# Altium PCB PAY_IFP_V1.PcbDoc (part 1 of 5)
Units mil, origin at the board's own origin, x right, y up, seen from the top; angles counter-clockwise.
Board outline 3661.42 x 3543.31 mil, 6 copper layers (L1 TOP, L2 GND 1, L3 SIGNAL, L4 PWR, L5 GND 2, L6 BOT), stack 59.685 mil thick; 511 components, 371 nets, 2264 pads, 383 vias.
Unrouted connection lines stored in the file: 1001.
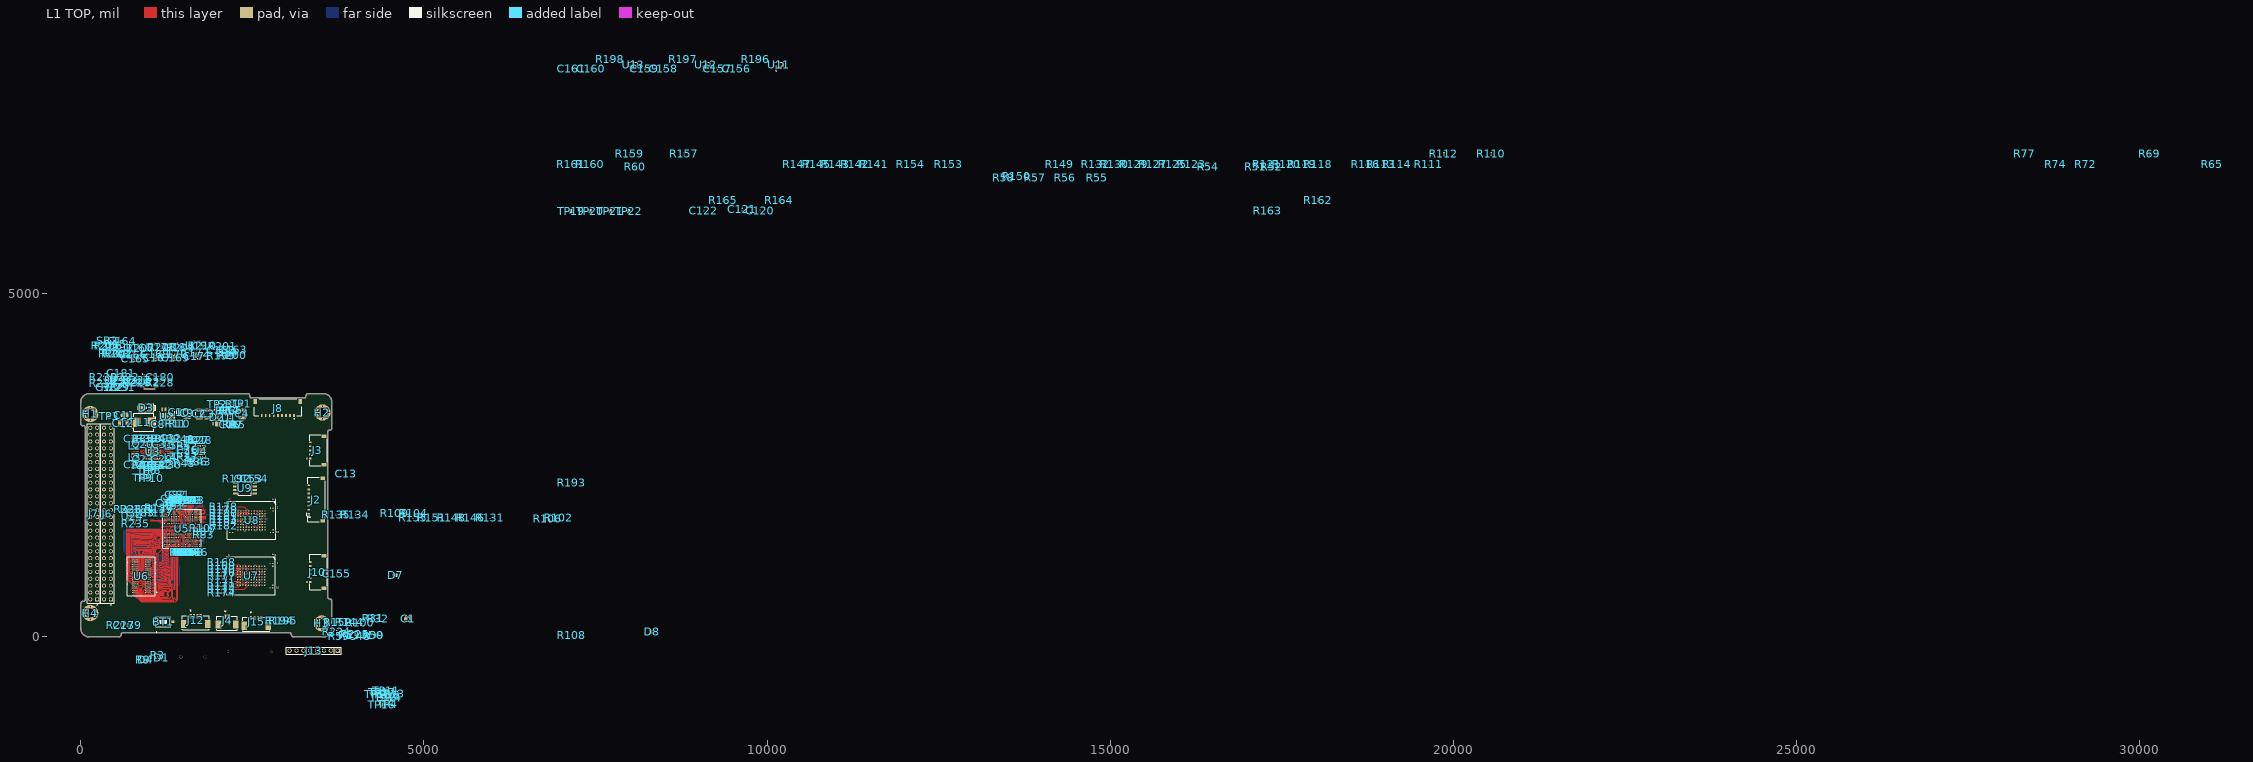
[diagram p0: L1 TOP view]
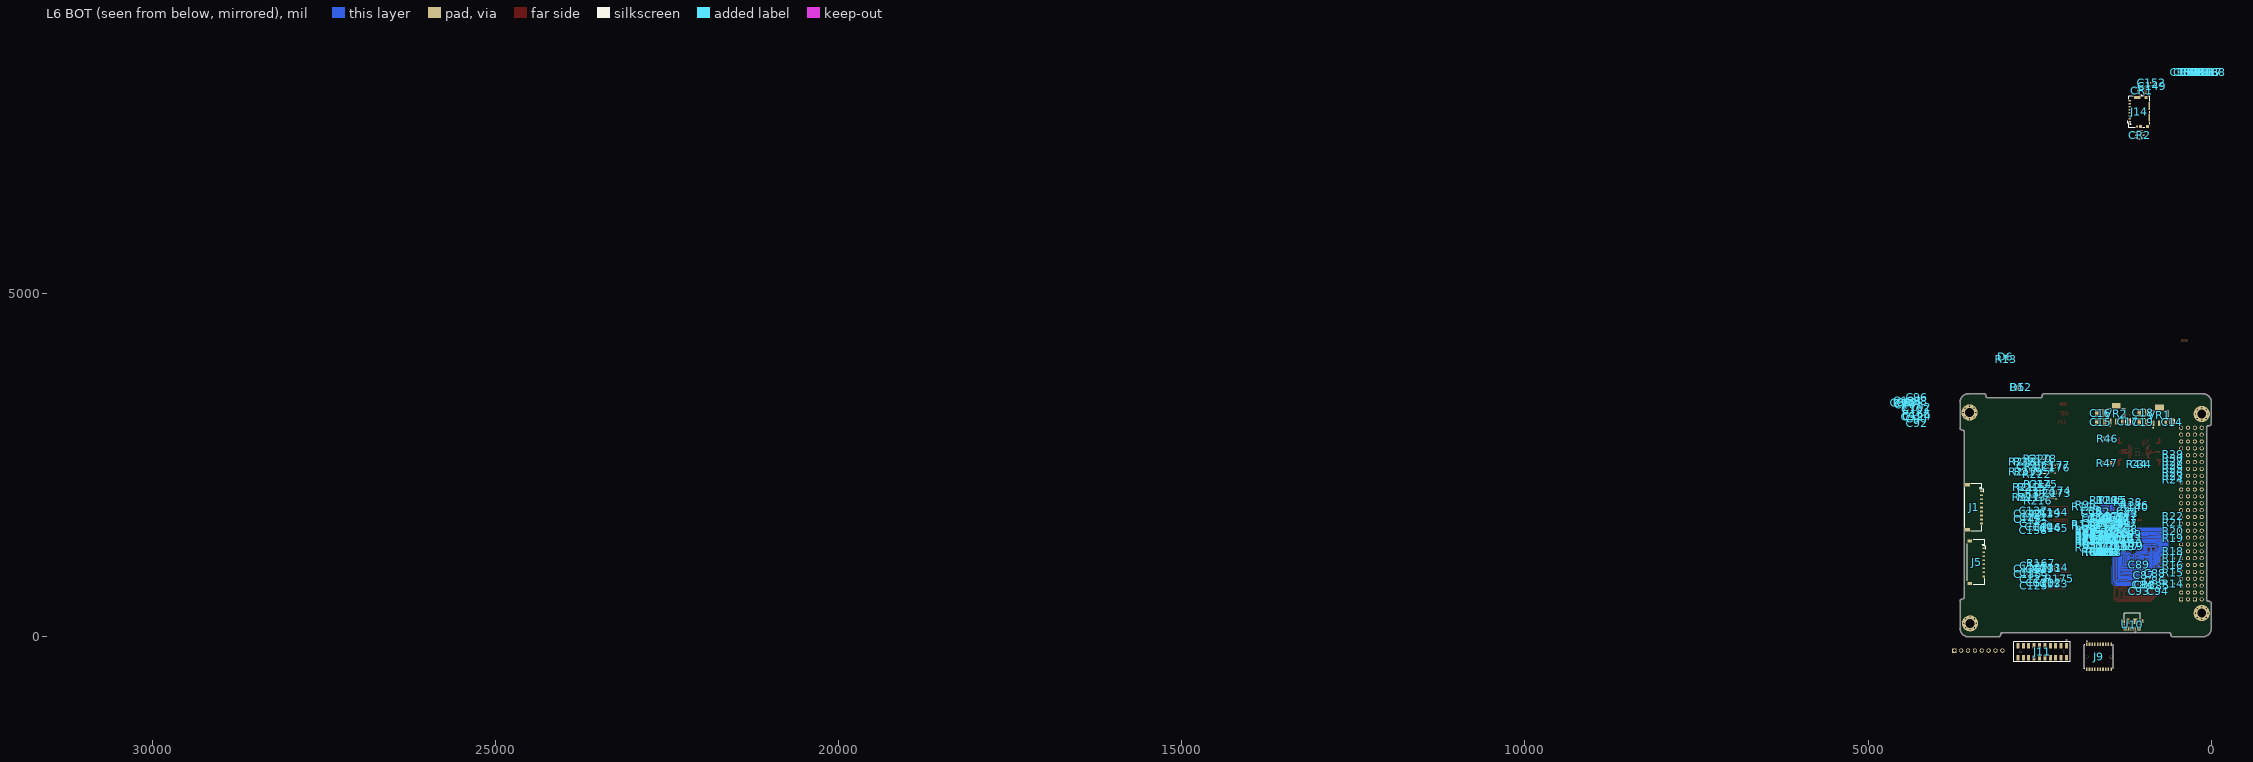
[diagram p1: L6 BOT view, seen from below]

## Layer stack, top to bottom
Top Solder: solder mask 0.4724, Solder Resist, Dk 4.3
L1 TOP: signal copper 0.7087
Dielectric 4: prepreg 3.5433, PP-006, Dk 4.5
L2 GND 1: signal copper 1.378
Dielectric 2: core 4.3307, PP-006, Dk 4.1
L3 SIGNAL: signal copper 1.378
Dielectric 1: dielectric 37.0079, FR-4, Dk 4.2
L4 PWR: signal copper 1.378
Dielectric 3: core 4.3307, PP-006, Dk 4.1
L5 GND 2: signal copper 1.378
Dielectric 5: prepreg 3.5433, PP-006, Dk 4.5
L6 BOT: signal copper 0.7087
Bottom Solder: solder mask 0.4724, Solder Resist, Dk 4.3

## Board outline
0,125.98 ccw(c125.98,125.98) 125.98,0 559.06,0 ccw(c559.06,31.5) 590.55,31.5 cw(c622.05,31.5) 622.05,62.99 2007.87,62.99 2657,62.99 2657.48,62.99 3039.37,62.99 cw(c3039.37,31.5) 3070.87,31.5 ccw(c3102.36,31.5) 3102.36,0 3535.43,0 ccw(c3535.43,125.98) 3661.42,125.98 3661.42,519.69 ccw(c3629.92,519.69) 3629.92,551.18 cw(c3629.92,582.68) 3598.43,582.68 3598.43,2980.59 cw(c3629.92,2980.59) 3629.92,3012.09 ccw(c3629.92,3043.59) 3661.42,3043.59 3661.42,3417.6 ccw(c3535.43,3417.32) 3535.71,3543.31 3535.43,3543.31 3314.96,3543.31 ccw(c3314.96,3511.81) 3283.46,3511.81 cw(c3251.97,3511.81) 3251.97,3480.31 2496.06,3480.32 cw(c2496.06,3511.81) 2464.57,3511.81 ccw(c2433.07,3511.81) 2433.07,3543.31 125.98,3543.31 125.71,3543.31 ccw(c125.98,3417.32) 0,3417.32 0,3108.27 ccw(c31.5,3108.27) 31.5,3076.77 39.37,3076.75 39.37,3076.77 cw(c39.37,3045.28) 70.87,3045.28 70.86,548.41 cw(c39.37,548.41) 39.37,516.92 31.49,516.94 ccw(c31.49,485.44) 0,485.44

## Design rules (kind name [scope] priority, off if disabled: settings)
BoardOutlineClearance [All] p1: gap=7.87 ignorepadtopadclearanceinfootprint=FALSE
Clearance Clearance_HD [InNetClass('HD')] p1: gap=23.62 ignorepadtopadclearanceinfootprint=FALSE
Clearance Clearance_KEEPOUT [IsKeepOut] p2: gap=0 ignorepadtopadclearanceinfootprint=FALSE
Clearance Clearance_BGA [WithinRoom('ROOM_SAMA7')] p3: gap=3.94 ignorepadtopadclearanceinfootprint=FALSE except(7.87: SMDPad-Fill SMDPad-Poly SMDPad-Region THPad-Fill THPad-Poly THPad-Region)
Clearance [All] p4: gap=3.94 ignorepadtopadclearanceinfootprint=FALSE except(4.92: Arc-Arc Arc-Track Track-Track Track-Via; 5.91: Arc-Fill Arc-Poly Arc-Region Track-Fill Track-Poly Track-Region SMDPad-Fill Via-Fill Via-Poly Via-Region Fill-Fill Fill-Poly Fill-Region Poly-Poly Poly-Region Region-Region; 7.87: SMDPad-Poly SMDPad-Region THPad-Fill THPad-Poly THPad-Region)
ComponentClearance [All] p1: gap=3.94 collisioncheckmode=3 verticalgap=0 showdistances=FALSE
DiffPairsRouting DiffPairs_100 [InDifferentialPairClass('DIFF100')] p1: maxlimit=9.45 minlimit=5.91 mostfreqgap=9.06 toplayer_mingap=6.3 toplayer_maxgap=6.3 toplayer_prefgap=6.3 toplayer_minwidth=4.92 toplayer_maxwidth=4.92 toplayer_prefwidth=4.92 midlayer2_mingap=9.06 midlayer2_maxgap=9.06 midlayer2_minwidth=3.94 midlayer2_maxwidth=3.94 midlayer2_prefwidth=3.94 midlayer3_mingap=9.06 midlayer3_maxgap=9.06 midlayer3_minwidth=3.94 midlayer3_maxwidth=3.94 midlayer3_prefwidth=3.94 bottomlayer_mingap=6.3 bottomlayer_maxgap=6.3 bottomlayer_prefgap=6.3 bottomlayer_minwidth=4.92 bottomlayer_maxwidth=4.92 bottomlayer_prefwidth=4.92 impedanceprofiledriven=TRUE impedanceprofileid={7DCAE575-E62E-4FB4-830B-AD6A277E48F7} impedanceprofilevalue=100.000000 filterlayerstackid={D54526CB-8AD5-485F-8D58-B8B2ED083D53} maxuncoupledlength=500
DiffPairsRouting DiffPairs_90 [InDifferentialPairClass('DIFF90')] p2: maxlimit=7.87 minlimit=5.91 mostfreqgap=7.87 toplayer_maxgap=5.91 toplayer_prefgap=5.91 toplayer_minwidth=4.92 toplayer_maxwidth=4.92 toplayer_prefwidth=4.92 midlayer2_mingap=7.87 midlayer2_minwidth=4.92 midlayer2_maxwidth=4.92 midlayer2_prefwidth=4.92 midlayer3_mingap=7.87 midlayer3_minwidth=4.92 midlayer3_maxwidth=4.92 midlayer3_prefwidth=4.92 bottomlayer_maxgap=5.91 bottomlayer_prefgap=5.91 bottomlayer_minwidth=4.92 bottomlayer_maxwidth=4.92 bottomlayer_prefwidth=4.92 impedanceprofiledriven=TRUE impedanceprofileid={482B14A7-7A58-4C4E-B4EF-1ACECD4C47D5} impedanceprofilevalue=90.000000 filterlayerstackid={D54526CB-8AD5-485F-8D58-B8B2ED083D53} maxuncoupledlength=1968.5
FanoutControl Fanout_Small [(CompPinCount < 5)] p4: bgadir=Out bgaviamode=Closest fanoutstyle=Auto fanoutdirection=OutOnly viagrid=1 // Fanout_Small (Default Rule)
FanoutControl Fanout_Default [All] p5: bgadir=Out bgaviamode=Centered fanoutstyle=Auto fanoutdirection=OutOnly viagrid=1 // Fanout_Default (Default Rule)
HoleSize [All] p1: absolutevalues=TRUE maxlimit=196.85 minlimit=1 maxpercent=80.000 minpercent=20.000
MatchedLengths "Schematic Matched Net Lengths_5" [InNetClass('DIFF90')] p1: tolerance=4 checknetsindiffpair=TRUE checkdiffpairvsdiffpair=FALSE checkxsignals=FALSE checkothers=FALSE
MatchedLengths "Schematic Matched Net Lengths_1" [InNetClass('JTAG')] p2: tolerance=78.74 checknetsindiffpair=FALSE checkdiffpairvsdiffpair=TRUE checkxsignals=TRUE checkothers=TRUE
MatchedLengths "Schematic Matched Net Lengths_9" [InNetClass('DDR-ADDR-CTL')] p3: tolerance=10 checknetsindiffpair=FALSE checkdiffpairvsdiffpair=TRUE checkxsignals=TRUE checkothers=TRUE
MatchedLengths "Schematic Matched Net Lengths_8" [InNetClass('DDR-LANE1')] p4: tolerance=10 checknetsindiffpair=FALSE checkdiffpairvsdiffpair=TRUE checkxsignals=TRUE checkothers=TRUE
MatchedLengths "Schematic Matched Net Lengths_3" [InNetClass('DDR-LANE0')] p5: tolerance=10 checknetsindiffpair=FALSE checkdiffpairvsdiffpair=TRUE checkxsignals=TRUE checkothers=TRUE
MatchedLengths "Schematic Matched Net Lengths_2" [InNetClass('DIFF100')] p6: tolerance=4 checknetsindiffpair=TRUE checkdiffpairvsdiffpair=FALSE checkxsignals=FALSE checkothers=FALSE
MatchedLengths CSI [InxSignalClass('xSignals_CSI')] p7: tolerance=1000 checknetsindiffpair=FALSE checkdiffpairvsdiffpair=TRUE checkxsignals=TRUE checkothers=TRUE usedelayunits=TRUE delaytolerance=5.000000
MatchedLengths DIFF_PAIR [InDifferentialPairClass('All Differential Pairs')] p8: tolerance=1000 checknetsindiffpair=TRUE checkdiffpairvsdiffpair=FALSE checkxsignals=FALSE checkothers=FALSE usedelayunits=TRUE delaytolerance=6.000000
MinimumSolderMaskSliver [All] p1: minsoldermaskwidth=4.72
PlaneConnect PlaneConnect_1 [InNet('GND') and IsVia] p1: planeconnectstyle=Direct reliefexpansion=20 reliefentries=4 reliefconductorwidth=10 reliefairgap=10
PlaneConnect [not(InNet('GND') and IsVIA)] p2: planeconnectstyle=Relief reliefexpansion=20 reliefentries=4 reliefconductorwidth=10 reliefairgap=10
PolygonConnect PolygonConnect_14 [All vs IsNamedPolygon('VDDIODDR_L01_P018')] p1: connectstyle=Direct reliefconductorwidth=10 reliefentries=4 polygonreliefangle="90 Angle" airgapwidth=10
PolygonConnect PolygonConnect_13 [All vs IsNamedPolygon('VDDIODDR_L01_P018')] p2: connectstyle=Direct reliefconductorwidth=10 reliefentries=4 polygonreliefangle="90 Angle" airgapwidth=10
PolygonConnect PolygonConnect_12 [All vs IsNamedPolygon('3V3_L01_P017')] p3: connectstyle=Direct reliefconductorwidth=10 reliefentries=4 polygonreliefangle="90 Angle" airgapwidth=10
PolygonConnect PolygonConnect_11 [All vs IsNamedPolygon('VDDCPU_L01_P016')] p4: connectstyle=Direct reliefconductorwidth=10 reliefentries=4 polygonreliefangle="90 Angle" airgapwidth=10
PolygonConnect PolygonConnect_10 [All vs IsNamedPolygon('VDDCORE_L01_P015')] p5: connectstyle=Direct reliefconductorwidth=10 reliefentries=4 polygonreliefangle="90 Angle" airgapwidth=10
PolygonConnect PolygonConnect_9 [All vs IsNamedPolygon('DCDC1_L01_P014')] p6: connectstyle=Direct reliefconductorwidth=10 reliefentries=4 polygonreliefangle="90 Angle" airgapwidth=10
PolygonConnect PolygonConnect_8 [All vs IsNamedPolygon('DCDC4_L01_P013')] p7: connectstyle=Direct reliefconductorwidth=10 reliefentries=4 polygonreliefangle="90 Angle" airgapwidth=10
PolygonConnect PolygonConnect_7 [All vs IsNamedPolygon('DCDC2_L01_P012')] p8: connectstyle=Direct reliefconductorwidth=10 reliefentries=4 polygonreliefangle="90 Angle" airgapwidth=10
PolygonConnect PolygonConnect_6 [All vs IsNamedPolygon('DCDC3_L01_P011')] p9: connectstyle=Direct reliefconductorwidth=10 reliefentries=4 polygonreliefangle="90 Angle" airgapwidth=10
PolygonConnect PolygonConnect_5 [All vs IsNamedPolygon('12V_CONN_L01_P008')] p10: connectstyle=Direct reliefconductorwidth=10 reliefentries=4 polygonreliefangle="90 Angle" airgapwidth=10
PolygonConnect PolygonConnect_4 [All vs IsNamedPolygon('12V_L01_P007')] p11: thpad.connectstyle=NoConnect thpad.reliefconductorwidth=10 thpad.reliefentries=4 thpad.polygonreliefangle="90 Angle" thpad.airgapwidth=10 smdpad.connectstyle=Direct smdpad.reliefconductorwidth=10 smdpad.reliefentries=4 smdpad.polygonreliefangle="90 Angle" smdpad.airgapwidth=10 via.connectstyle=Direct via.reliefconductorwidth=10 via.reliefentries=4 via.polygonreliefangle="90 Angle" via.airgapwidth=10
PolygonConnect PolygonConnect_3 [All vs IsNamedPolygon('5V_L01_P001')] p12: connectstyle=Direct reliefconductorwidth=10 reliefentries=4 polygonreliefangle="90 Angle" airgapwidth=10
PolygonConnect PolygonConnect_2 [All vs IsNamedPolygon('NETC8_1_L01_P000')] p13: connectstyle=Direct reliefconductorwidth=10 reliefentries=4 polygonreliefangle="90 Angle" airgapwidth=10
PolygonConnect PolygonConnect_1 [(InNet('+5V_USB-Adaptor') OR InNet('+3V3_CM4') OR InNet('+5V_AUX-Adaptor'))] p14: connectstyle=Direct reliefconductorwidth=10 reliefentries=4 polygonreliefangle="90 Angle" airgapwidth=10
PolygonConnect [NOT (InComponent('U4') OR InComponent('U7'))] p15: thpad.connectstyle=Relief thpad.reliefconductorwidth=15.75 thpad.reliefentries=4 thpad.polygonreliefangle="90 Angle" thpad.airgapwidth=10 thpad.conductorbypadedge=TRUE thpad.mindistance=15 thpad.enablemindistance=FALSE smdpad.connectstyle=Relief smdpad.reliefconductorwidth=7.87 smdpad.reliefentries=4 smdpad.polygonreliefangle="90 Angle" smdpad.airgapwidth=5.91 smdpad.conductorbypadedge=TRUE smdpad.mindistance=15 smdpad.enablemindistance=FALSE via.connectstyle=Direct via.reliefconductorwidth=7.87 via.reliefentries=4 via.polygonreliefangle="90 Angle" via.airgapwidth=10
RoutingVias [All] p1: holewidth=7.87 width=15.75 viastyle="Through Hole" minholewidth=7.87 minwidth=13.78 maxholewidth=39.37 maxwidth=78.74
SilkToSilkClearance [All] p1: silktosilkclearance=4.92
SilkToSolderMaskClearance [IsPad] p1: minsilkscreentomaskgap=3.94 clearancetoexposedcopper=TRUE
SolderMaskExpansion [All] p1: expansion=4 istentingtop=FALSE
SupplyNets "Schematic Supply Nets_17" [InNet('3V3_COM')] p1: voltage=0.000
SupplyNets "Schematic Supply Nets_25" [InNet('12V')] p2: voltage=0.000
SupplyNets "Schematic Supply Nets_24" [InNet('VLDO1')] p3: voltage=0.000
SupplyNets "Schematic Supply Nets_23" [InNet('DDR_VREF')] p4: voltage=0.000
SupplyNets "Schematic Supply Nets_22" [InNet('GOM_VBAT')] p5: voltage=0.000
SupplyNets "Schematic Supply Nets_21" [InNet('3.3_VBAT')] p6: voltage=0.000
SupplyNets "Schematic Supply Nets_20" [InNet('BUS_5V')] p7: voltage=0.000
SupplyNets "Schematic Supply Nets_18" [InNet('BUS_3V3')] p8: voltage=0.000
SupplyNets "Schematic Supply Nets_16" [InNet('GND')] p9: voltage=0.000
SupplyNets "Schematic Supply Nets_14" [InNet('DCDC1')] p10: voltage=0.000
SupplyNets "Schematic Supply Nets_13" [InNet('DCDC3')] p11: voltage=0.000
SupplyNets "Schematic Supply Nets_12" [InNet('DCDC4')] p12: voltage=0.000
SupplyNets "Schematic Supply Nets_11" [InNet('3V3')] p13: voltage=0.000
SupplyNets "Schematic Supply Nets_10" [InNet('VLDO2')] p14: voltage=0.000
SupplyNets "Schematic Supply Nets_9" [InNet('VDDCPU')] p15: voltage=0.000
SupplyNets "Schematic Supply Nets_8" [InNet('12V_CONN')] p16: voltage=0.000
SupplyNets "Schematic Supply Nets_7" [InNet('VDDOUT25')] p17: voltage=0.000
SupplyNets "Schematic Supply Nets_6" [InNet('VDDIODDR')] p18: voltage=0.000
SupplyNets "Schematic Supply Nets_5" [InNet('DCDC2')] p19: voltage=0.000
SupplyNets "Schematic Supply Nets_4" [InNet('STX_12V')] p20: voltage=0.000
SupplyNets "Schematic Supply Nets_3" [InNet('5V')] p21: voltage=0.000
SupplyNets "Schematic Supply Nets_2" [InNet('VDDCORE')] p22: voltage=0.000
SupplyNets "Schematic Supply Nets_1" [InNet('VDDBU')] p23: voltage=0.000
SupplyNets "Schematic Supply Nets" [InNet('3V3_eMMC')] p24: voltage=0.000
Width Width_1 [All] p1: maxlimit=78.74 minlimit=3.94 preferedwidth=4.92 minimp=50.000000 maximp=50.000000 favimp=50.000000
21 further rules are at their usual default settings.

## Classes and differential pairs
net class 50_eMMC2: SDMMC1_CLK SDMMC1_CMD SDMMC1_D0 SDMMC1_D1 SDMMC1_D2 SDMMC1_D3
net class QSPI: MRAM_QSPI_CLK MRAM_QSPI_CS MRAM_QSPI_D0 MRAM_QSPI_D1 MRAM_QSPI_D2 MRAM_QSPI_D3
component class USB_SWITCH: C183 C184 R235 R236 R237 U24
component class DEBUG_CONSOLE: C155 D7 J15 R193 R194 R195 U10
component class CONNECTOR_INTERFACE: J5 J6 J7 J8 J9 J10 J11 J12 R14 R15 R16 R17 R18 R19 R20 R21 R22 R23 R24 R25 R26 R27 R28 R29 R30 R31 R32
differential pair class DIFF90: EXP_USB USB_CONNECTOR USB_DEBUG USBA USBB
net class JTAG: JTAG_NTRST_PC22 JTAG_TCK_PC23 JTAG_TDI_PC25 JTAG_TDO_PC26 JTAG_TMS_PC24
net class 50_eMMC1: SDMMC0_CLK SDMMC0_CMD SDMMC0_D0 SDMMC0_D1 SDMMC0_D2 SDMMC0_D3 SDMMC0_D4 SDMMC0_D5 SDMMC0_D6 SDMMC0_D7
component class WATCHDOG: C164 R202 R203 R204 R205 R206 SB2 U15
component class TEMP: C156 C157 C158 C159 C160 C161 R196 R197 R198 U11 U12 U13
component class SDCARD: C149 C150 C151 C152 CR1 CR2 J14 R185 R186 R187 R188 R189 R190 R191
component class SAMA7D65_PMIC: C20 C21 C22 C23 C24 C25 C26 C27 C28 C29 C30 C31 C32 C33 C34 C35 C36 L2 L3 L4 L5 R33 R34 R35 R36 R37 R38 R39 R40 R41 R42 R43 R44 R45 R46 R47 R48 R49 TP4 TP5 TP6 TP7 TP8 TP9 TP10 U3 U4
component class SAMA7D65_PIO: J13 R63 R64 R65 R66 R67 R68 R69 R70 R71 R72 R73 R74 R75 R76 R77 R78 R79 R80 R81 R82 R83 R84 R85 R86 R87 R88 R89 R90 R91 R92 R93 R94 R95 R96 R97 R98 R99 R100 R101 R102 R103 R104 R105 R106 R107 R108 R109 R110 R111 R112 R113 R114 R115 R116 R117 R118 R119 R120 R121 R122 R123 R124 R125 R126 R127 R128 R129 R130 R131 R132 R133 R134 R135 R136 R137 R138 R139 R140 R141 R142 R143 R144 R145 R146 R147 R148 R149 R150 R151 R152 R153 R154 R155 R156 R157 R158 R159 R160 R161 U5
component class SAMA7D65_MPU: C37 C38 C39 C40 C41 C42 C43 C44 C45 C46 C47 C48 C49 C50 C51 C52 C53 C54 C55 C56 C57 C58 C59 C60 C61 C62 C63 C64 C65 C66 C67 C68 C69 C70 C71 C72 C73 C74 C75 C76 C77 C78 C79 C80 C81 C82 R50 R51 R52 R53 R54 R55 R56 R57 R58 R59 R60 R61 R62 Y1 Y2
component class SAMA7D65_DDR3L: C83 C84 C85 C86 C87 C88 C89 C90 C91 C92 C93 C94 C95 C96 C97 C98 C99 C100 C101 C102 C103 C104 C105 C106 C107 C108 C109 C110 C111 C112 C113 C114 C115 C116 C117 C118 C119 C120 C121 C122 C123 C124 R162 R163 R164 R165 R166 TP11 TP12 TP13 TP14 TP15 TP16 TP17 TP18 TP19 TP20 TP21 TP22 U6
component class RTC: C162 C163 R199 R200 R201 U14
component class RS485: C180 R226 R227 R228 U22
component class RS422: C181 C182 R229 R230 R231 R232 R233 R234 U23
component class POWER: C2 C3 C4 C5 C6 C7 C8 C9 C10 C11 C12 C13 C14 C15 C16 C17 C18 C19 D1 D2 D3 D4 D5 D6 J3 J4 L1 R1 R2 R3 R4 R5 R6 R7 R8 R9 R10 R11 R12 R13 SB1 TP1 TP2 TP3 U1 U2 VR1 VR2
component class LVDS: C165 C166 C167 C168 C169 C170 C171 C172 R207 R208 R209 R210 U16 U17 U18 U19
component class eMMC: C125 C126 C127 C128 C129 C130 C131 C132 C133 C134 C135 C136 C137 C138 C139 C140 C141 C142 C143 C144 C145 C146 C147 C148 R167 R168 R169 R170 R171 R172 R173 R174 R175 R176 R177 R178 R179 R180 R181 R182 R183 R184 U7 U8
component class EEPROM: C153 C154 R192 U9
component class MOUNTING_HOLE: H1 H2 H3 H4
component class CONNECTOR_EXP: C1 J1 J2
component class CAN_PHY: C173 C174 C175 C176 C177 C178 CR3 CR4 R211 R212 R213 R214 R215 R216 R217 R218 R219 R220 R221 R222 U20 U21
component class BUTTON_LED: BT1 C179 D8 D9 R223 R224 R225
net class DIFF90: EXP_USB_N EXP_USB_P USB_CONNECTOR_N USB_CONNECTOR_P USB_DEBUG_N USB_DEBUG_P USBA_N USBA_P
net class DDR-LANE1: DDR_D8 DDR_D9 DDR_D10 DDR_D11 DDR_D12 DDR_D13 DDR_D14 DDR_D15 DDR_DQM1 DDR_DQS1_N DDR_DQS1_P
net class DDR-LANE0: DDR_D0 DDR_D1 DDR_D2 DDR_D3 DDR_D4 DDR_D5 DDR_D6 DDR_D7 DDR_DQM0 DDR_DQS0_N DDR_DQS0_P
net class DDR-ADDR-CTL: DDR_A0 DDR_A1 DDR_A2 DDR_A3 DDR_A4 DDR_A5 DDR_A6 DDR_A7 DDR_A8 DDR_A9 DDR_A10 DDR_A11 DDR_A12 DDR_A13 DDR_A14 DDR_A15 DDR_BA0 DDR_BA1 DDR_BA2 DDR_CAS DDR_CK_N DDR_CK_P DDR_CKE DDR_CS DDR_ODT DDR_RAS DDR_WE
net class DIFF100: DDR_CK_N DDR_CK_P DDR_DQS0_N DDR_DQS0_P DDR_DQS1_N DDR_DQS1_P
differential pair class DIFF100: CAM1_CK CAM1_D0 CAM1_D1 CAM2_CK CAM2_D0 CAM2_D1 CAM_CK CAM_D0 CAM_D1 DDR_CK DDR_DQS0 DDR_DQS1 L_CAM1_CK L_CAM1_D0 L_CAM1_D1 L_CAM2_CK L_CAM2_D0 L_CAM2_D1 MIPI_CK MIPI_D0 MIPI_D1 SOM_CAM_CK SOM_CAM_D0 SOM_CAM_D1
differential pair USB_CONNECTOR: +USB_CONNECTOR_P -USB_CONNECTOR_N
differential pair USB_DEBUG: +USB_DEBUG_P -USB_DEBUG_N
differential pair LVDS_RXD: +LVDS_RXD_P -LVDS_RXD_N
differential pair LVDS_RXC: +LVDS_RXC_P -LVDS_RXC_N
differential pair USBA: +USBA_P -USBA_N
differential pair STX_RS485: +STX_RS485_P -STX_RS485_N
differential pair RS_422_TX: +RS_422_TX_P -RS_422_TX_N
differential pair RS_422_RX: +RS_422_RX_P -RS_422_RX_N
differential pair LVDS_TxD: +LVDS_TxD_P -LVDS_TxD_N
differential pair LVDS_TxC: +LVDS_TxC_P -LVDS_TxC_N
differential pair EXP_USB: +EXP_USB_P -EXP_USB_N
differential pair SENSE4: +SENSE4_P -SENSE4_N
differential pair SENSE3: +SENSE3_P -SENSE3_N
differential pair SENSE2: +SENSE2_P -SENSE2_N
differential pair SENSE1: +SENSE1_P -SENSE1_N
differential pair DDR_DQS1: +DDR_DQS1_P -DDR_DQS1_N
differential pair DDR_DQS0: +DDR_DQS0_P -DDR_DQS0_N
differential pair DDR_CK: +DDR_CK_P -DDR_CK_N

## Components (designator, comment, footprint, x,y, rotation, side; value= is the part's Value field where it differs from the comment)
BT1 "BT_" SW2-SMD 1204.72,220.47 r180 top value="SW chip 2 pin"
C1 "10uF/20V" CAP_C_2012X110 4771,262 r180 top
C2 "47uF/25V" CAP_C_3225X80 1728.35,3248.03 r90 top
C3 "47uF/25V" CAP_C_3225X80 1854.33,3248.03 r90 top
C4 "47uF/25V" CAP_C_3225X80 2354.33,3248.03 r90 top
C5 "1uF/20V" CAP_C_1005X50_L 2259.84,3299.21 r90 top
C6 "2.2nF/10V" CAP_C_1005X50_L 2220.47,3086.61 r90 top
C7 "2.2nF/10V" CAP_C_1005X50_L 2130.51,3086.61 r90 top
C8 "0.1uF/10V" CAP_C_1005X50_L 1132.31,3098.47 r270 top
C9 "47uF/25V" CAP_C_3225X80 1551.18,3255.91 r90 top
C10 "10uF/20V" CAP_C_2012X110 1437.01,3271.65 r90 top
C11 "10uF/20V" CAP_C_2012X110 641.73,3228.34 r0 top
C12 "47uF/25V" CAP_C_3225X80 622.05,3110.24 r0 top
C13 "0.1uF/10V" CAP_C_1005X50_L 3868,2375.28 r270 top
C14 "10uF/20V" CAP_C_2012X110 566.93,3125.98 r270 bottom
C15 "47uF/25V" CAP_C_3225X80 1611.43,3125.52 r180 bottom
C16 "47uF/25V" CAP_C_3225X80 1612.28,3258.25 r180 bottom
C17 "10uF/20V" CAP_C_2012X110 1208.86,3131.29 r270 bottom
C18 "47uF/25V" CAP_C_3225X80 995.24,3263.73 r180 bottom
C19 "47uF/25V" CAP_C_3225X80 995.24,3125.04 r180 bottom
C20 "4.7uF/10V" CAP_C_1005X50_L 912.34,2808.28 r270 top
C21 "22uF/10V" CAP_C_1608X80 787.92,2889.76 r0 top
C22 "1uF/20V" CAP_C_1005X50_L 1191.33,2498.02 r90 top
C23 "4.7uF/10V" CAP_C_1005X50_L 912.34,2586.71 r90 top
C24 "22uF/10V" CAP_C_1608X80 787.92,2503.94 r0 top
C25 "0.1uF/10V" CAP_C_1005X50_L 1563,2673.56 r0 top
C26 "4.7uF/10V" CAP_C_1005X50_L 1563,2728.02 r0 top
C27 "0.1uF/10V" CAP_C_1005X50_L 1724.41,2865.16 r270 top
C28 "4.7uF/10V" CAP_C_1005X50_L 1767.72,2865.16 r270 top
C29 "4.7uF/10V" CAP_C_1005X50_L 1191.34,2586.71 r90 top
C30 "22uF/10V" CAP_C_1608X80 1316.7,2507.87 r180 top
C31 "4.7uF/10V" CAP_C_1005X50_L 1192.92,2808.28 r270 top
C32 "22uF/10V" CAP_C_1608X80 1316.7,2893.7 r180 top
C33 "4.7uF/10V" CAP_C_1005X50_L 1025.2,2885.82 r270 top
C34 "4.7uF/10V" CAP_C_1005X50_L 1023.62,2515.75 r90 bottom
C35 "4.7uF/10V" CAP_C_1005X50_L 968.13,2498.02 r90 top
C36 "4.7uF/10V" CAP_C_1005X50_L 1023.93,2498.02 r90 top
C37 "4.7uF/10V" CAP_C_1005X50_L 1736.23,1795.2 r180 bottom
C38 "0.1uF/10V" CAP_C_0603x30 1733.23,1834.2 r180 bottom
C39 "0.1uF/10V" CAP_C_0603x30 1591.23,1741.2 r0 bottom
C40 "0.1uF/10V" CAP_C_0603x30 1642.69,1715.53 r90 bottom
C41 "0.1uF/10V" CAP_C_0603x30 1721.23,1728.2 r180 bottom
C42 "0.1uF/10V" CAP_C_0603x30 1604.23,1673.2 r0 bottom
C43 "4.7uF/10V" CAP_C_1005X50_L 1219.23,1793.2 r0 bottom
C44 "0.1uF/10V" CAP_C_0603x30 1220.23,1836.2 r0 bottom
C45 "0.1uF/10V" CAP_C_0603x30 1335.23,1690.2 r0 bottom
C46 "0.1uF/10V" CAP_C_0603x30 1592.23,1716.2 r180 bottom
C47 "0.1uF/10V" CAP_C_0603x30 1227.23,1652.2 r0 bottom
C48 "18pF/10V" CAP_C_0603x30 4072.77,11.17 r0 top
C49 "0.1uF/10V" CAP_C_0603x30 1413.23,1639.2 r270 bottom
C50 "0.1uF/10V" CAP_C_0603x30 1552.75,1626.31 r180 bottom
C51 "0.1uF/10V" CAP_C_0603x30 1643.23,1625.2 r180 bottom
C52 "0.1uF/10V" CAP_C_0603x30 1558.23,1524.2 r90 bottom
C53 "0.1uF/10V" CAP_C_0603x30 1645.23,1524.2 r180 bottom
C54 "0.1uF/10V" CAP_C_0603x30 1591.23,1460.2 r270 bottom
C55 "0.1uF/10V" CAP_C_0603x30 1593.23,1409.2 r0 bottom
C56 "0.1uF/10V" CAP_C_0603x30 1659.23,1421.2 r270 bottom
C57 "0.1uF/10V" CAP_C_0603x30 1721.23,1421.2 r180 bottom
C58 "0.1uF/10V" CAP_C_0603x30 1721.23,1400.2 r180 bottom
C59 "4.7uF/10V" CAP_C_1005X50_L 1722.23,1350.2 r90 bottom
C60 "0.1uF/10V" CAP_C_0603x30 1527.23,1407.2 r90 bottom
C61 "0.1uF/10V" CAP_C_0603x30 1720.56,1575.2 r180 bottom
C62 "0.1uF/10V" CAP_C_0603x30 1629.23,1821.2 r270 bottom
C63 "0.1uF/10V" CAP_C_0603x30 1723.23,1653.2 r180 bottom
C64 "0.1uF/10V" CAP_C_0603x30 1630.23,1329.2 r90 bottom
C65 "0.1uF/10V" CAP_C_0603x30 1425.23,1742.2 r270 bottom
C66 "0.1uF/10V" CAP_C_0603x30 1527.23,1744.2 r270 bottom
C67 "0.1uF/10V" CAP_C_0603x30 1721.23,1498.2 r180 bottom
C68 "0.1uF/10V" CAP_C_0603x30 1228.35,1575.2 r0 bottom
C69 "4.7uF/10V" CAP_C_1005X50_L 1368.23,1633.2 r180 bottom
C70 "0.1uF/10V" CAP_C_0603x30 1390.23,1672.2 r180 bottom
C71 "2.2uF/10V" CAP_C_1005X50_L 1231.23,1705.2 r0 bottom
C72 "0.1uF/10V" CAP_C_0603x30 1553.23,1330.2 r90 bottom
C73 "0.1uF/10V" CAP_C_0603x30 1336.23,1741.2 r180 bottom
C74 "0.1uF/10V" CAP_C_0603x30 1303.23,1627.2 r0 bottom
C75 "0.1uF/10V" CAP_C_0603x30 1617.23,1460.54 r270 bottom
C76 "0.1uF/10V" CAP_C_0603x30 1476.23,1330.2 r90 bottom
C77 "0.1uF/10V" CAP_C_0603x30 1230.23,1736.2 r0 bottom
C78 "0.1uF/10V" CAP_C_0603x30 1405.23,1754.2 r270 bottom
C79 "18pF/10V" CAP_C_0603x30 1251.97,1948.82 r90 top
C80 "18pF/10V" CAP_C_0603x30 1330.71,2015.75 r180 top
C81 "18pF/10V" CAP_C_0603x30 1446.36,2070.87 r0 top
C82 "18pF/10V" CAP_C_0603x30 1387.56,2071.49 r180 top
C83 "4.7uF/10V" CAP_C_1005X50_L 963.5,757.29 r90 bottom
C84 "0.1uF/10V" CAP_C_0603x30 995.5,756.29 r90 bottom
C85 "0.1uF/10V" CAP_C_0603x30 759.5,741.29 r270 bottom
C86 "0.1uF/10V" CAP_C_0603x30 814.5,820.29 r180 bottom
C87 "0.1uF/10V" CAP_C_0603x30 980.5,898.29 r180 bottom
C88 "0.1uF/10V" CAP_C_0603x30 818.5,925.29 r270 bottom
C89 "0.1uF/10V" CAP_C_0603x30 1052.5,1047.29 r90 bottom
C90 "0.1uF/10V" CAP_C_0603x30 4282.31,3177.27 r0 bottom
C91 "0.1uF/10V" CAP_C_0603x30 4359.65,3208.27 r180 bottom
C92 "0.1uF/10V" CAP_C_0603x30 4282.31,3114.27 r0 bottom
C93 "0.1uF/10V" CAP_C_0603x30 1050.87,661.04 r90 bottom
C94 "0.1uF/10V" CAP_C_0603x30 775.26,664.88 r180 bottom
C95 "0.1uF/10V" CAP_C_0603x30 4516.98,3407.27 r180 bottom
C96 "0.1uF/10V" CAP_C_0603x30 4282.31,3487.27 r0 bottom
C97 "0.1uF/10V" CAP_C_0603x30 4467.98,3403.27 r180 bottom
C98 "0.1uF/10V" CAP_C_0603x30 4282.31,3429.27 r0 bottom
C99 "0.1uF/10V" CAP_C_0603x30 4425.32,3415.27 r180 bottom
C100 "0.1uF/10V" CAP_C_0603x30 1200.56,1356.2 r180 bottom
C101 "0.1uF/10V" CAP_C_0603x30 4403.32,3384.27 r180 bottom
C102 "0.1uF/10V" CAP_C_0603x30 4282.31,3344.27 r0 bottom
C103 "4.7uF/10V" CAP_C_1005X50_L 4300.03,3314.27 r0 bottom
C104 "0.1uF/10V" CAP_C_0603x30 1308.23,1524.2 r0 bottom
C105 "0.1uF/10V" CAP_C_0603x30 1388.23,1501.2 r0 bottom
C106 "0.1uF/10V" CAP_C_0603x30 1463.23,1562.2 r270 bottom
C107 "0.1uF/10V" CAP_C_0603x30 1489.23,1561.2 r270 bottom
C108 "0.1uF/10V" CAP_C_0603x30 1528.23,1495.2 r180 bottom
C109 "0.1uF/10V" CAP_C_0603x30 1221.23,1498.2 r0 bottom
C110 "0.1uF/10V" CAP_C_0603x30 1377.23,1421.2 r90 bottom
C111 "0.1uF/10V" CAP_C_0603x30 1361.23,1460.2 r0 bottom
C112 "0.1uF/10V" CAP_C_0603x30 1438.23,1408.2 r90 bottom
C113 "0.1uF/10V" CAP_C_0603x30 1214.23,1421.2 r0 bottom
C114 "0.1uF/10V" CAP_C_0603x30 1310.23,1434.2 r270 bottom
C115 "0.1uF/10V" CAP_C_0603x30 1333.23,1435.2 r270 bottom
C116 "0.1uF/10V" CAP_C_0603x30 1399.23,1330.2 r90 bottom
C117 "0.1uF/10V" CAP_C_0603x30 1250.23,1318.2 r90 bottom
C118 "0.1uF/10V" CAP_C_0603x30 1323.23,1315.2 r270 bottom
C119 "4.7uF/10V" CAP_C_1005X50_L 1192.23,1317.2 r0 bottom
C120 "0.1uF/10V" CAP_C_0603x30 9900.77,6210.17 r90 top
C121 "4.7uF/10V" CAP_C_1005X50_L 9639.77,6228.17 r90 top
C122 "0.1uF/10V" CAP_C_0603x30 9079.77,6210.17 r90 top
C123 "0.1uF/10V" CAP_C_0603x30 4418.32,3438.27 r180 bottom
C124 "0.1uF/10V" CAP_C_0603x30 4282.31,3211.27 r0 bottom
C125 "4.7uF/10V" CAP_C_1005X50_L 2579.2,746.48 r0 bottom
C126 "4.7uF/10V" CAP_C_1005X50_L 2579.2,1032.48 r0 bottom
C127 "0.1uF/10V" CAP_C_1005X50_L 2579.2,841.48 r0 bottom
C128 "0.1uF/10V" CAP_C_1005X50_L 2579.2,936.48 r0 bottom
C129 "0.1uF/10V" CAP_C_1005X50_L 2493.2,985.48 r0 bottom
C130 "0.1uF/10V" CAP_C_1005X50_L 2489.2,790.48 r0 bottom
C131 "0.1uF/10V" CAP_C_1005X50_L 2381.2,1001.48 r180 bottom
C132 "0.1uF/10V" CAP_C_1005X50_L 2381.2,791.48 r180 bottom
C133 "0.1uF/10V" CAP_C_1005X50_L 2286.2,771.48 r90 bottom
C134 "0.1uF/10V" CAP_C_1005X50_L 2286.2,1008.48 r270 bottom
C135 "1uF/20V" CAP_C_1005X50_L 2666.92,911.48 r180 bottom
C136 "0.1uF/10V" CAP_C_1005X50_L 2666.2,994.48 r180 bottom
C137 "4.7uF/10V" CAP_C_1005X50_L 2587.12,1833.83 r0 bottom
C138 "4.7uF/10V" CAP_C_1005X50_L 2586.12,1554.83 r0 bottom
C139 "0.1uF/10V" CAP_C_1005X50_L 2389.12,1795.83 r180 bottom
C140 "0.1uF/10V" CAP_C_1005X50_L 2500.12,1601.83 r0 bottom
C141 "0.1uF/10V" CAP_C_1005X50_L 2499.12,1792.83 r0 bottom
C142 "0.1uF/10V" CAP_C_1005X50_L 2582.12,1743.83 r0 bottom
C143 "0.1uF/10V" CAP_C_1005X50_L 2582.12,1651.83 r0 bottom
C144 "0.1uF/10V" CAP_C_1005X50_L 2291.12,1815.83 r270 bottom
C145 "0.1uF/10V" CAP_C_1005X50_L 2291.12,1578.83 r90 bottom
C146 "0.1uF/10V" CAP_C_1005X50_L 2387.12,1596.83 r180 bottom
C147 "1uF/20V" CAP_C_1005X50_L 2666.12,1796.83 r180 bottom
C148 "0.1uF/10V" CAP_C_1005X50_L 2670.12,1716.83 r180 bottom
C149 "0.1uF/10V" CAP_C_1005X50_L 859,8024 r180 bottom
C150 "0.1uF/10V" CAP_C_1005X50_L 387.09,8222.68 r90 bottom
C151 "1uF/20V" CAP_C_1005X50_L 337.87,8222.68 r90 bottom
C152 "1uF/20V" CAP_C_1005X50_L 866,8074 r180 bottom
C153 "0.1uF/10V" CAP_C_1005X50_L 2450.79,2303.15 r0 top
C154 "0.1uF/10V" CAP_C_1005X50_L 2531.5,2303.15 r180 top
C155 "0.1uF/10V" CAP_C_1005X50_L 3732.77,917.17 r90 top
C156 "1uF/20V" CAP_C_1005X50_L 9558.77,8277.17 r90 top
C157 "1uF/20V" CAP_C_1005X50_L 9278.77,8277.17 r90 top
C158 "1uF/20V" CAP_C_1005X50_L 8497.77,8277.17 r90 top
C159 "1uF/20V" CAP_C_1005X50_L 8217.77,8277.17 r90 top
C160 "1uF/20V" CAP_C_1005X50_L 7437.77,8277.17 r90 top
C161 "1uF/20V" CAP_C_1005X50_L 7157.77,8277.17 r90 top
C162 "0.1uF/10V" CAP_C_1005X50_L 2050,4175 r90 top
C163 "0.1uF/10V" CAP_C_1005X50_L 2221,4180 r270 top
C164 "1uF/20V" CAP_C_1005X50_L 603,4305 r90 top
C165 "10uF/20V" CAP_C_2012X110 799.43,4053.01 r180 top
C166 "1uF/20V" CAP_C_1005X50_L 769,4109 r180 top
C167 "10uF/20V" CAP_C_2012X110 1123.24,4064.5 r180 top
C168 "1uF/20V" CAP_C_1005X50_L 1092.81,4120.5 r180 top
C169 "10uF/20V" CAP_C_2012X110 1384,4064 r180 top
C170 "1uF/20V" CAP_C_1005X50_L 1355,4119 r180 top
C171 "10uF/20V" CAP_C_2012X110 1708,4087 r180 top
C172 "1uF/20V" CAP_C_1005X50_L 1679,4142 r180 top
C173 "0.1uF/10V" CAP_C_1005X50_L 2243.98,2089.2 r0 bottom
C174 "0.1uF/10V" CAP_C_1005X50_L 2243.98,2129.2 r0 bottom
C175 "0.1uF/10V" CAP_C_1005X50_L 2442.93,2225.42 r0 bottom
C176 "0.1uF/10V" CAP_C_1005X50_L 2258.19,2461.09 r0 bottom
C177 "0.1uF/10V" CAP_C_1005X50_L 2258.19,2501.09 r0 bottom
C178 "0.1uF/10V" CAP_C_1005X50_L 2453.19,2596.09 r0 bottom
C179 "2.2uF/10V" CAP_C_1005X50_L 683.07,171.98 r90 top
C180 "0.1uF/10V" CAP_C_1005X50_L 1162,3779 r270 top
C181 "0.1uF/10V" CAP_C_1005X50_L 594,3843 r0 top
C182 "0.1uF/10V" CAP_C_1005X50_L 428.72,3635 r180 top
C183 "4.7uF/10V" CAP_C_1005X50_L 877.95,1807.09 r180 top
C184 "0.1uF/10V" CAP_C_1005X50_L 877.95,1862.2 r180 top
CR1 "IP4220CZ6,125" DIODE_SOT457_1P7X3P1_NEX 1012.25,7956 r180 bottom
CR2 "IP4220CZ6,125" DIODE_SOT457_1P7X3P1_NEX 1042.75,7309 r180 bottom
CR3 "ESDCAN02-2BWY" SOT323-3L_STM 2661.42,2098.43 r90 bottom
CR4 "ESDCAN02-2BWY" SOT323-3L_STM 2673.28,2478.09 r90 bottom
D1 "LTST-C281KRKT" LED_0402 1182.32,-307.4 r270 top
D2 "SS54" DO-214AC_SMA 1993,3196.38 r270 top value=SS34
D3 "SS54" DO-214AC_SMA 952.76,3338.58 r180 top value=SS34
D4 "LTST-C281KSKT" LED_0402 949.32,-335.07 r90 top
D5 "LTST-C281KGKT" LED_0402 2818.9,3638.89 r90 bottom
D6 "LTST-C281KGKT" LED_0402 2992.3,4080.08 r0 bottom
D7 "LTST-C281TBKT" LED_0402 4593.77,901.17 r0 top
D8 "LTST-C281TBKT" LED_0402 8330.77,73.17 r0 top
D9 "LTST-C281KGKT" LED_0402 4313.77,22.17 r0 top
H1 "hole_space" HOLE_SPACE 140.55,3246.46 r0 top
H2 "hole_space" HOLE_SPACE 3523.62,3267.72 r0 top
H3 "hole_space" HOLE_SPACE 3515.75,196.85 r0 top
H4 "hole_space" HOLE_SPACE 140.55,346.46 r0 top
J1 "5040500991" MOLEX_5040500991 3469,1886 r90 bottom
J2 "5040500891" MOLEX_5040500891 3437.01,2000 r270 top
J3 "5040500591" 5040500591 3464.57,2716.54 r270 top
J4 "0532610271" MOLEX_0532610271 2132.87,200.79 r0 top
J5 "5040500891" MOLEX_5040500891 3429.13,1086.61 r90 bottom
J6 "ESQ-126-14-G-D" SAMTEC_ESQ-126-14-G-D 440.55,546.46 r90 top
J7 "ESQ-126-14-G-D" SAMTEC_ESQ-126-14-G-D 240.55,546.46 r90 top
J8 "5040500991" 5040500991 2874.02,3346.46 r0 top
J9 "FSI-110-03-G-D-AD" SAMTEC_FSI-110-03-X-D-AD-TR 1637.8,-290.94 r180 bottom
J10 "5040500691" 5040500691 3464.57,944.88 r270 top
J11 "TLE-110-01-G-DV-A-TR" SAMTEC-TLE-110-01-X-DV-A 2464.57,-215.67 r0 bottom
J12 "HEADER 4x1" MOLEX_0532610471 1677.17,204.72 r0 top
J13 "Header 8x1" Header_254P_8x1 3394.88,-200.79 r180 top
J14 "Molex_1051620001" MOLEX_1051620001 1051.51,7646.92 r270 bottom
J15 "0532610471" MOLEX_0532610471 2558.07,181.1 r0 top
L1 "SRP7050TA-220M" SRP7050TA-220M 921.03,3127.19 r180 top
L2 "1.5uH 3.5A" IND_C_1008 788.9,2783.46 r90 top
L3 "1.5uH 3.5A" IND_C_1008 788.9,2618.11 r270 top
L4 "1.5uH 3.5A" IND_C_1008 1314.37,2620.08 r270 top
L5 "1.5uH 3.5A" IND_C_1008 1314.37,2785.43 r90 top
R1 "47k" RES_C_1005x30_L#1 2118,3296.69 r90 top
R2 "47k" RES_C_1005x30_L#1 2078,3296.69 r90 top
R3 "4.7k" RES_C_1005x30_L#2 1121.32,-271.07 r90 top
R4 "470k" RES_C_1005x30_L#1 2216.54,3299.21 r270 top
R5 "1k" RES_C_1005x30_L#1 2307.09,3086.61 r270 top
R6 "47k" RES_C_1005x30_L#1 2158,3296.69 r90 top
R7 "10k" RES_C_1005x30_L#1 2263.78,3086.61 r270 top
R8 "1k" RES_C_1005x30_L#1 2180.53,3086.61 r270 top
R9 "1k" RES_C_1005x30_L#1 914.32,-335.07 r270 top
R10 "10k" RES_C_1005x30_L#1 1442.31,3102.19 r90 top
R11 "3.24k" RES_C_1005x30_L#1 1396.31,3102.19 r90 top
R12 "1k" RES_C_1005x30_L#1 2769.69,3639.84 r270 bottom
R13 "1k" RES_C_1005x30_L#1 2991.01,4042.08 r180 bottom
R14 "0R" RES_C_1005x30_L#1 555.12,771.65 r0 bottom
R15 "0R" RES_C_1005x30_L#1 555.12,937.01 r180 bottom
R16 "0R" RES_C_1005x30_L#1 555.12,1043.31 r180 bottom
R17 "0R" RES_C_1005x30_L#1 555.12,1141.73 r180 bottom
R18 "0R" RES_C_1005x30_L#1 555.11,1248.03 r0 bottom
R19 "0R" RES_C_1005x30_L#1 555.12,1433.07 r180 bottom
R20 "0R" RES_C_1005x30_L#1 555.12,1535.43 r180 bottom
R21 "0R" RES_C_1005x30_L#1 555.12,1665.35 r180 bottom
R22 "0R" RES_C_1005x30_L#1 555.12,1755.91 r180 bottom
R23 "0R" RES_C_1005x30_L#1 555.12,2340.26 r180 bottom
R24 "0R" RES_C_1005x30_L#1 555.11,2287.4 r0 bottom
R25 "0R" RES_C_1005x30_L#1 555.12,2446 r180 bottom
R26 "0R" RES_C_1005x30_L#1 555.11,2393.14 r0 bottom
R27 "0R" RES_C_1005x30_L#1 555.12,2551.74 r180 bottom
R28 "0R" RES_C_1005x30_L#1 555.11,2498.88 r0 bottom
R29 "0R" RES_C_1005x30_L#1 555.12,2657.48 r0 bottom
R30 "0R" RES_C_1005x30_L#1 555.12,2604.61 r180 bottom
R31 "DNP/0R" RES_C_1005x30_L#1 4259.84,269.69 r90 top
R32 "DNP/0R" RES_C_1005x30_L#1 4335.77,266.17 r90 top
R33 "0R" RES_C_1005x30_L#1 1079.73,2498.03 r90 top
R34 "0R" RES_C_1005x30_L#1 1135.53,2498.03 r90 top
R35 "1k" RES_C_1005x30_L#1 912.35,2885.81 r270 top
R36 "4.7k" RES_C_1005x30_L#2 1696.24,2549.22 r90 top
R37 "4.7k" RES_C_1005x30_L#2 1562.99,2617.13 r0 top
R38 "100k" RES_C_1005x30_L#1 970.08,2885.83 r90 top
R39 "10k" RES_C_1005x30_L#1 1137.01,2885.83 r90 top
R40 "10k" RES_C_1005x30_L#1 1192.91,2885.83 r90 top
R41 "10k" RES_C_1005x30_L#1 1681.1,2865.16 r90 top
R42 "10k" RES_C_1005x30_L#1 1563,2782.49 r0 top
R43 "0R" RES_C_1005x30_L#1 1747.42,2549.21 r270 top
R44 "10k" RES_C_1005x30_L#1 1079.73,2515.75 r90 bottom
R45 "10k" RES_C_1005x30_L#1 912.33,2498.03 r90 top
R46 "Shunt 4 Pin" RES_C_1206_SHUNT 1512.47,2883.37 r0 bottom value=0.047R
R47 "Shunt 4 Pin" RES_C_1206_SHUNT 1517.01,2527.07 r0 bottom value=0.047R
R48 "Shunt 4 Pin" RES_C_1206_SHUNT 1517.01,2526.08 r0 top value=0.047R
R49 "Shunt 4 Pin" RES_C_1206_SHUNT 1512.47,2882.38 r0 top value=0.047R
R50 "10k" RES_C_1005x30_L#1 4260.77,21.17 r0 top
R51 "10k" RES_C_1005x30_L#1 17121.77,6846.17 r90 top
R52 "5.62k" RES_C_1005x30_L#1 17351.77,6846.17 r90 top
R53 "DNP/10k" RES_C_1005x30_L#1 3920.77,21.17 r0 top
R54 "10k" RES_C_1005x30_L#1 16430.77,6846.17 r90 top
R55 "16.9k" RES_C_0603X30 14808.77,6692.17 r90 top
R56 "16.9k" RES_C_0603X30 14348.77,6692.17 r90 top
R57 "20k" RES_C_0603X30 13907.77,6692.17 r90 top
R58 "16.9k" RES_C_0603X30 13447.77,6692.17 r90 top
R59 "1k" RES_C_1005x30_L#1 3770,10 r0 top
R60 "DNP/0R" RES_C_1005x30_L#1 8078.77,6846.17 r90 top
R61 "1M 1%" RES_C_1005x30_L#1 1355.97,1908.1 r225 top
R62 "1M 1%" RES_C_1005x30_L#1 1416.83,1951.28 r0 top
R63 "22R" RES_C_0603X30 1820.65,1392.57 r0 bottom
R64 "22R" RES_C_0603X30 1727.89,1235.85 r270 bottom
R65 "22R" RES_C_0603X30 31055.77,6883.17 r90 top
R66 "22R" RES_C_0603X30 1821.56,1510.24 r0 bottom
R67 "22R" RES_C_0603X30 1820.65,1369.7 r0 bottom
R68 "22R" RES_C_0603X30 1821.56,1533.86 r0 bottom
R69 "4.7k" RES_C_1005x30_L#2 30144.77,7037.17 r90 top
R70 "22R" RES_C_0603X30 1668.09,1235.85 r270 bottom
R71 "22R" RES_C_0603X30 1550.2,1235.85 r270 bottom
R72 "22R" RES_C_0603X30 29213.77,6883.17 r90 top
R73 "22R" RES_C_0603X30 1821.56,1557.48 r0 bottom
R74 "22R" RES_C_0603X30 28772.77,6883.17 r90 top
R75 "22R" RES_C_0603X30 1527.23,1235.85 r270 top
R76 "22R" RES_C_0603X30 1820.65,1440.57 r0 bottom
R77 "4.7k" RES_C_1005x30_L#2 28322.77,7037.17 r90 top
R78 "22R" RES_C_0603X30 1526.82,1235.85 r270 bottom
R79 "22R" RES_C_0603X30 1820.65,1416.95 r0 bottom
R80 "22R" RES_C_0603X30 1482.6,1235.85 r270 top
R81 "22R" RES_C_0603X30 1821.64,1464.19 r0 bottom
R82 "22R" RES_C_0603X30 1503.61,1235.85 r270 top
R83 "22R" RES_C_0603X30 1797.03,1487.81 r0 top
R84 "22R" RES_C_0603X30 1570.87,1236.22 r270 top
R85 "22R" RES_C_0603X30 1821.64,1487.81 r0 bottom
R86 "22R" RES_C_0603X30 1503.44,1235.85 r270 bottom
R87 "22R" RES_C_0603X30 1796.96,1533.86 r0 top
R88 "22R" RES_C_0603X30 1576.77,1236.22 r270 bottom
R89 "22R" RES_C_0603X30 1456.69,1236.22 r270 top
R90 "22R" RES_C_0603X30 1606.91,1235.75 r270 bottom
R91 "22R" RES_C_0603X30 1614.17,1236.22 r270 top
R92 "22R" RES_C_0603X30 1820.65,1299.61 r0 bottom
R93 "22R" RES_C_0603X30 1656.28,1987.81 r90 top
R94 "22R" RES_C_0603X30 1480.07,1235.85 r270 bottom
R95 "22R" RES_C_0603X30 1821.56,1922.64 r0 bottom
R96 "22R" RES_C_0603X30 1706.36,1235.85 r270 top
R97 "22R" RES_C_0603X30 1546.05,1987.81 r90 top
R98 "22R" RES_C_0603X30 1456.69,1235.85 r270 bottom
R99 "22R" RES_C_0603X30 1593.29,1987.81 r90 top
R100 "22R" RES_C_0603X30 4072.77,202.17 r0 top
R101 "22R" RES_C_0603X30 1523.29,1987.81 r90 top
R102 "22R" RES_C_0603X30 6965.77,1733.17 r90 top
R103 "22R" RES_C_0603X30 1569.67,1987.81 r90 top
R104 "4.7k" RES_C_1005x30_L#2 4853.77,1798.17 r90 top
R105 "22R" RES_C_0603X30 1466.32,1987.81 r90 bottom
R106 "22R" RES_C_0603X30 6805.77,1723.17 r0 top
R107 "22R" RES_C_0603X30 1796.96,1582.67 r0 top
R108 "22R" RES_C_0603X30 7151.77,24.17 r90 top
R109 "4.7k" RES_C_1005x30_L#2 4573.77,1798.17 r90 top
R110 "4.7k" RES_C_1005x30_L#2 20552.77,7037.17 r90 top
R111 "22R" RES_C_0603X30 19642.77,6883.17 r90 top
R112 "4.7k" RES_C_1005x30_L#2 19862.77,7037.17 r90 top
R113 "22R" RES_C_0603X30 18951.77,6883.17 r90 top
R114 "22R" RES_C_0603X30 19181.77,6883.17 r90 top
R115 "22R" RES_C_0603X30 1430.77,1987.81 r90 bottom
R116 "22R" RES_C_0603X30 18721.77,6883.17 r90 top
R117 "22R" RES_C_0603X30 1146.93,1808.68 r180 top
R118 "22R" RES_C_0603X30 18030.77,6883.17 r90 top
R119 "22R" RES_C_0603X30 17799.77,6883.17 r90 top
R120 "22R" RES_C_0603X30 17569.77,6883.17 r90 top
R121 "22R" RES_C_0603X30 17289.77,6883.17 r90 top
R122 "22R" RES_C_0603X30 1819.61,1641.15 r0 bottom
R123 "22R" RES_C_0603X30 16188.77,6883.17 r90 top
R124 "22R" RES_C_0603X30 1492.13,1987.81 r90 top
R125 "22R" RES_C_0603X30 15908.77,6883.17 r90 top
R126 "22R" RES_C_0603X30 1821.56,1897.64 r0 bottom
R127 "22R" RES_C_0603X30 15627.77,6883.17 r90 top
R128 "22R" RES_C_0603X30 1563.76,1987.81 r90 bottom
R129 "22R" RES_C_0603X30 15347.77,6883.17 r90 top
R130 "22R" RES_C_0603X30 15067.77,6883.17 r90 top
R131 "22R" RES_C_0603X30 5964.77,1733.17 r90 top
R132 "22R" RES_C_0603X30 14787.77,6883.17 r90 top
R133 "22R" RES_C_0603X30 1819.61,1618.11 r0 bottom
R134 "22R" RES_C_0603X30 4002.77,1780.17 r90 top
R135 "22R" RES_C_0603X30 3722.77,1780.17 r90 top
R136 "22R" RES_C_0603X30 1115.44,1914.15 r180 bottom
R137 "22R" RES_C_0603X30 1146.93,1884.22 r180 top
R138 "22R" RES_C_0603X30 1211.4,1957.8 r90 bottom
R139 "22R" RES_C_0603X30 1146.93,1860.39 r180 top
R140 "22R" RES_C_0603X30 1115.44,1889.39 r180 bottom
R141 "22R" RES_C_0603X30 11563.77,6883.17 r90 top
R142 "22R" RES_C_0603X30 11283.77,6883.17 r90 top
R143 "22R" RES_C_0603X30 11003.77,6883.17 r90 top
R144 "4.7k" RES_C_1005x30_L#2 3920.77,212.17 r0 top
R145 "22R" RES_C_0603X30 10723.77,6883.17 r90 top
R146 "22R" RES_C_0603X30 5684.77,1733.17 r90 top
R147 "22R" RES_C_0603X30 10442.77,6883.17 r90 top
R148 "22R" RES_C_0603X30 5404.77,1733.17 r90 top
R149 "22R" RES_C_0603X30 14266.77,6883.17 r90 top
R150 "22R" RES_C_0603X30 13637,6709 r90 top
R151 "22R" RES_C_0603X30 5123.77,1733.17 r90 top
R152 "4.7k" RES_C_1005x30_L#2 3750.77,212.17 r0 top
R153 "22R" RES_C_0603X30 12645.77,6883.17 r90 top
R154 "22R" RES_C_0603X30 12094.77,6883.17 r90 top
R155 "22R" RES_C_0603X30 4843.77,1733.17 r90 top
R156 "22R" RES_C_0603X30 1550.2,1235.85 r270 top
R157 "DNP/10k" RES_C_1005x30_L#1 8791.77,7037.17 r90 top
R158 "22R" RES_C_0603X30 1590.55,1235.85 r270 top
R159 "10k" RES_C_1005x30_L#1 7998.77,7037.17 r90 top
R160 "22R" RES_C_0603X30 7427.77,6883.17 r90 top
R161 "22R" RES_C_0603X30 7147.77,6883.17 r90 top
R162 "100k" RES_C_1005x30_L#1 18027.77,6364.17 r90 top
R163 "240R" RES_C_0603X30 17297.77,6210.17 r90 top
R164 "1k" RES_C_1005x30_L#1 10180.77,6364.17 r90 top
R165 "1k" RES_C_1005x30_L#1 9359.77,6364.17 r90 top
R166 "240R" RES_C_0603X30 4282.32,3243.27 r180 bottom
R167 "10k" RES_C_1005x30_L#1 2480.89,1073.67 r180 bottom
R168 "10k" RES_C_1005x30_L#1 2059.48,1085.88 r0 top
R169 "10k" RES_C_1005x30_L#1 2059.48,1036.28 r0 top
R170 "10k" RES_C_1005x30_L#1 2059.48,986.68 r0 top
R171 "10k" RES_C_1005x30_L#1 2059.48,788.28 r0 top
R172 "10k" RES_C_1005x30_L#1 2059.48,738.68 r0 top
R173 "10k" RES_C_1005x30_L#1 2059.48,689.08 r0 top
R174 "10k" RES_C_1005x30_L#1 2058.2,639.48 r0 top
R175 "10k" RES_C_1005x30_L#1 2208.65,848.24 r0 bottom
R176 "10k" RES_C_1005x30_L#1 2059.48,937.08 r0 top
R177 "10k" RES_C_1005x30_L#1 2059.48,887.48 r0 top
R178 "10k" RES_C_1005x30_L#1 2085.4,1893.83 r0 top
R179 "10k" RES_C_1005x30_L#1 2085.4,1848.49 r0 top
R180 "10k" RES_C_1005x30_L#1 2085.4,1803.16 r0 top
R181 "10k" RES_C_1005x30_L#1 2085.4,1757.83 r0 top
R182 "10k" RES_C_1005x30_L#1 2085.4,1621.83 r0 top
R183 "10k" RES_C_1005x30_L#1 2085.4,1712.49 r0 top
R184 "10k" RES_C_1005x30_L#1 2085.4,1667.16 r0 top
R185 "DNP/10k" RES_C_1005x30_L#1 288.67,8222.68 r90 bottom
R186 "DNP/10k" RES_C_1005x30_L#1 91.82,8222.68 r90 bottom
R187 "DNP/10k" RES_C_1005x30_L#1 42.61,8222.68 r90 bottom
R188 "DNP/10k" RES_C_1005x30_L#1 -6.61,8222.68 r90 bottom
R189 "DNP/10k" RES_C_1005x30_L#1 239.46,8222.68 r90 bottom
R190 "DNP/10k" RES_C_1005x30_L#1 190.24,8222.68 r90 bottom
R191 "10k" RES_C_1005x30_L#1 141.03,8222.68 r90 bottom
R192 "4.7k" RES_C_1005x30_L#2 2271.65,2303.15 r180 top
R193 "1k" RES_C_1005x30_L#1 7157.77,2247.17 r90 top
R194 "10k" RES_C_1005x30_L#1 2903.54,236.34 r90 top
R195 "10k" RES_C_1005x30_L#1 2950.78,236.34 r90 top
R196 "22R" RES_C_1005x30_L#1 9838.77,8413.17 r90 top
R197 "22R" RES_C_1005x30_L#1 8778.77,8413.17 r90 top
R198 "22R" RES_C_1005x30_L#1 7717.77,8413.17 r90 top
R199 "4.7k" RES_C_1005x30_L#2 2050,4098 r270 top
R200 "4.7k" RES_C_1005x30_L#2 2219,4103.31 r90 top
R201 "4.7k" RES_C_1005x30_L#2 2070.68,4232 r0 top
R202 "22R" RES_C_1005x30_L#1 557,4127.28 r270 top
R203 "22R" RES_C_1005x30_L#1 518,4127.28 r270 top
R204 "22R" RES_C_1005x30_L#1 478,4127.28 r270 top
R205 "16.5k" RES_C_1005x30_L#1 365,4239 r270 top
R206 "16.5k" RES_C_1005x30_L#1 412,4239.28 r270 top
R207 "100R" RES_C_1005x30_L#1 876,4205 r270 top
R208 "100R" RES_C_1005x30_L#1 1190,4221 r270 top
R209 "100R" RES_C_1005x30_L#1 1468,4211 r90 top
R210 "100R" RES_C_1005x30_L#1 1779,4237.72 r90 top
R211 "22R" RES_C_1005x30_L#1 2688.96,2030.49 r0 bottom
R212 "22R" RES_C_1005x30_L#1 2685.23,2183.08 r0 bottom
R213 "60R" RES_C_1005x30_L#1 2610.24,2030.49 r0 bottom
R214 "22R" RES_C_1005x30_L#1 2521.65,2224.42 r180 bottom
R215 "60R" RES_C_1005x30_L#1 2610.23,2183.08 r180 bottom
R216 "10k" RES_C_1005x30_L#1 2525.59,1980.32 r0 bottom
R217 "22R" RES_C_1005x30_L#1 2741.99,2406.16 r0 bottom
R218 "22R" RES_C_1005x30_L#1 2741.17,2549.22 r0 bottom
R219 "60R" RES_C_1005x30_L#1 2663.28,2407.16 r0 bottom
R220 "22R" RES_C_1005x30_L#1 2531.91,2595.09 r180 bottom
R221 "60R" RES_C_1005x30_L#1 2666.17,2549.22 r180 bottom
R222 "10k" RES_C_1005x30_L#1 2537.91,2369.09 r0 bottom
R223 "100R" RES_C_1005x30_L#1 584.64,171.99 r90 top
R224 "1k" RES_C_1005x30_L#1 3734,76 r90 top
R225 "1k" RES_C_1005x30_L#1 4002.77,39.17 r90 top
R226 "10k" RES_C_1005x30_L#1 822,3699 r0 top
R227 "10k" RES_C_1005x30_L#1 822,3739 r0 top
R228 "120R" RES_C_1005x30_L#1 1162.01,3704.28 r270 top
R229 "4.7k" RES_C_1005x30_L#2 508,3636 r180 top
R230 "4.7k" RES_C_1005x30_L#2 340,3779 r90 top
R231 "DNP/4.7k" RES_C_1005X40 588.69,3636 r0 top
R232 "120R" RES_C_1005x30_L#1 652,3782 r270 top
R233 "120R" RES_C_1005x30_L#1 652,3706.28 r270 top
R234 "4.7k" RES_C_1005x30_L#2 340,3692.31 r90 top
R235 "10k" RES_C_1005X40 803.15,1649.61 r0 top
R236 "1k" RES_C_1005X40 696.85,1858.27 r0 top
R237 "1k" RES_C_1005X40 787.4,1862.2 r180 top
SB1 "JUMPER" JUMPER_1608 2161.42,3389.76 r0 top
SB2 "JUMPER" JUMPER_1608 393,4317 r180 top
TP1 "" "Test point" 2338.58,3393.7 r90 top
TP2 "" "Test point" 1992.13,3385.83 r90 top
TP3 "" "Test point" 413.39,3212.6 r180 top
TP4 "" "Test point" 4470.88,-981.84 r90 top
TP5 "" "Test point" 1448.82,2787.4 r90 top
TP6 "" "Test point" 968.5,2425.2 r90 top
TP7 "" "Test point" 1452.76,2625.98 r90 top
TP8 "" "Test point" 1027.56,2425.2 r90 top
TP9 "" "Test point" 902.5,2317.27 r90 top
TP10 "" "Test point" 1012.5,2313.27 r90 top
TP11 "" "Test point" 4455.88,-784.84 r90 top
TP12 "" "Test point" 4414.88,-873.84 r90 top
TP13 "" "Test point" 4527.88,-830.84 r90 top
TP14 "" "Test point" 4481.88,-884.84 r90 top
TP15 "" "Test point" 4339.6,-836.62 r90 top
TP16 "" "Test point" 4384.88,-988.84 r90 top
TP17 "" "Test point" 4393.88,-804.84 r90 top
TP18 "" "Test point" 4457.88,-840.84 r90 top
TP19 "" "Test point" 7146.77,6199.17 r90 top
TP20 "" "Test point" 7426.77,6199.17 r90 top
TP21 "" "Test point" 7717.77,6199.17 r90 top
TP22 "" "Test point" 7987.77,6199.17 r90 top
U1 "TPS259470ARPWR" VQFN-HR-10 2165.27,3189.62 r270 top
U2 "TPS5430DDAR" CONV_TPS5430DDAR 1261.72,3206.6 r90 top
U3 "MCP16502 QFN-32" QFN-32_5X5_EP3.7X3.7 1052.13,2696.57 r270 top value=MCP16502TAB-E/S8B
U4 "Microchip PAC1934 UQFN-16" UQFN-16_4X4_EP2.6X2.6 1735.24,2700.79 r0 top value=PAC1934
U5 "SAMA7D65" TFBGA-343_14x14 1476.05,1575.2 r0 top locked value=SAMA7D65-V/4HB-SL3
U6 "IS43TR16512BL-125KBLI" TWBGA96_ISI 885.5,882.29 r180 top locked
U7 "MTFC32GAZAQDW-AAT" BGA_100_C_100P_10X17_1400X1800X150#1 2484.24,890.31 r270 top
U8 "MTFC32GAZAQDW-AAT" BGA_100_C_100P_10X17_1400X1800X150#2 2489.49,1696.77 r270 top locked
U9 "AS3004204-0108X0PSAY" SOIC127P790X216-8N 2393.7,2165.35 r0 top
U10 "473460001" 47346-0001_MOL 1154.72,224.06 r0 bottom
U11 "TC1047AVNBTR" SOT-23_MC_MCH 10169.77,8338.17 r0 top
U12 "TC1047AVNBTR" SOT-23_MC_MCH 9108.77,8338.17 r0 top
U13 "TC1047AVNBTR" SOT-23_MC_MCH 8048.77,8338.17 r0 top
U14 "RV-3129-C3-32.768KHZ-OPTION-A-TB-QA" IC_RV-3129-C3-32.768KHZ-OPTION-A-TB-QA 2139.31,4140.01 r0 top
U15 "TPL5010DDCR" TPL5010DDCR 515,4266 r270 top
U16 "DS90LV011AQ-Q1" DS90LV011AQ-Q1 792,4210 r90 top
U17 "DS90LV011AQ-Q1" DS90LV011AQ-Q1 1114,4218 r90 top
U18 "DS90LT012AQ-Q1" DS90LV011AQ-Q1 1375,4219 r90 top
U19 "DS90LT012AQ-Q1" DS90LV011AQ-Q1 1694,4244 r90 top
U20 "SN65HVD230DR" SOIC127P599X175-8N 2421.7,2100.65 r0 bottom
U21 "SN65HVD230DR" SOIC127P599X175-8N 2435.91,2479.09 r0 bottom
U22 "MAX3485CSA+T" 21-0041-3-M_90-0096-8L_MXM 1000.98,3718.06 r0 top
U23 "LTC2865HMSE#TRPBF" MSOP-12_MSE_LIT 510.75,3739.4 r0 top
U24 "FSUSB74MPX" QFN50P300X300X80-17N 754.49,1755.91 r180 top
VR1 "LM1117MP-3.3/NOPB" VREG_LM1117MP-3.3/NOPB 756.13,3227.04 r90 bottom
VR2 "LM1117MP-3.3/NOPB" VREG_LM1117MP-3.3/NOPB 1386.02,3252.35 r90 bottom
Y1 "Crystal 4 Pins" XTAL_ECS2401037B2JTNTR 1306.1,1969.49 r0 top value=24MHz
Y2 "Crystal 2 Pins" CRYSTAL_FC-12M_L2.05W1.2H0.6 1417.32,2017.06 r180 top value="32.768 kHz"

## Footprints (in the part's own frame and the unit in brackets; to place one, negate y for a bottom-side part, rotate by r counter-clockwise, add the part's x,y. Pads: shape width x height; smd on the part's side, far side on the other; paste and mask are expansions set on the pad)
21-0041-3-M_90-0096-8L_MXM [mil]
  rect 78x21.29 smd paste+0 mask+0: 1(-97.05,75) 2(-97.05,25) 3(-97.05,-25) 4(-97.05,-75) 5(97.05,-75) 6(97.05,-25) 7(97.05,25) 8(97.05,75)
  silkscreen extent -102,-103 84,112, body extent -122,-98 122,98, height 69
47346-0001_MOL [mil]
  rect 18x54 smd paste+0 mask+0: 1(-51.18,101.58) 2(-25.59,101.58) 3(0,101.58) 4(25.59,101.58) 5(51.18,101.58)
  rect 56x61 smd paste+0 mask+0: 6(-97.93,98.24) 7(97.93,98.24)
  rect 65x51 smd paste+0 mask+0: 8(-132.87,-3.14) 9(132.87,-3.14)
  rect 71x75 smd paste+0 mask+0: 10(-45.28,-3.14)
  rect 39x75 smd paste+0 mask+0: 11(61,-3.14)
  silkscreen extent -117,-118 117,159, body extent -157,-109 157,104, height 106
5040500591 [mil]
  rect 26x41 smd: 1(118.11,-119.76) 2(59.06,-119.76) 3(0,-119.76) 4(-59.06,-119.76) 5(-118.11,-119.76)
  rect 51x73 smd: 6(-208.86,84.57) 6(208.86,84.57)
  silkscreen extent -226,-173 227,125, body extent -237,-134 237,120, height 79
5040500691 [mil]
  rect 26x41 smd paste+0: 1(147.64,-119.76) 2(88.58,-119.76) 3(29.53,-119.76) 4(-29.53,-119.76) 5(-88.58,-119.76) 6(-147.64,-119.76)
  rect 51x73 smd: 7(-238.19,84.57) 7(238.19,84.57)
  silkscreen extent -256,-173 256,125, body extent -267,-128 267,126, height 79
5040500991 [mil]
  rect 26x41 smd: 1(236.22,-119.76) 2(177.17,-119.76) 3(118.11,-119.76) 4(59.06,-119.76) 5(0,-119.76) 6(-59.06,-119.76) 7(-118.11,-119.76) 8(-177.17,-119.76) 9(-236.22,-119.76)
  rect 51x73 smd: M1(326.97,84.57) M2(-326.97,84.57)
  silkscreen extent -344,-173 344,126, body extent -354,-129 357,124, height 79